# EAGLE board Humidity (EAGLE 7.2.0)
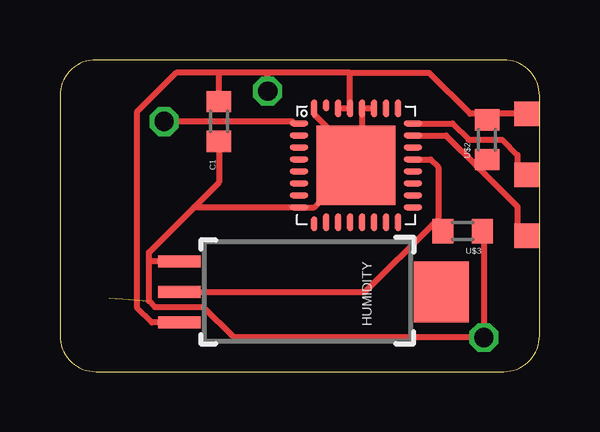
[diagram p0: board, top side]
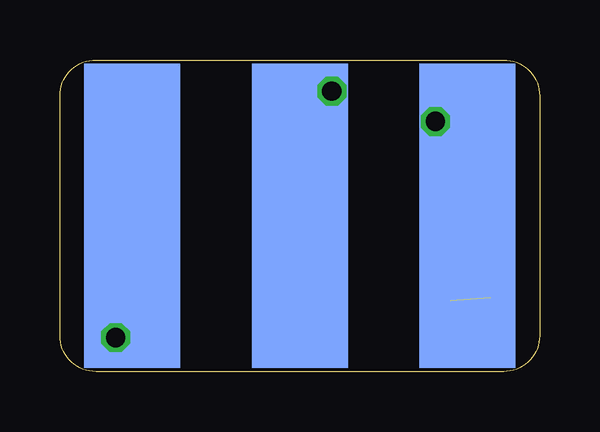
[diagram p1: board, bottom side, seen from below]

Size 20 x 13 mm. Coordinates in mm from the lower left corner, seen from the top.
Copper layers (1*16): Top 0.035mm / dielectric 1.5mm / Bottom 0.035mm
Design rules "Bilex DRU *": minimum track width 10mil, minimum drill 24mil, track to track 10mil, track to pad 10mil, pad to pad 10mil, via to via 10mil, smd to smd 10mil, copper to edge 1mil, drill to drill 8mil, minimum pad ring 10mil, minimum via ring 8mil, stop-mask expansion 4mil, vias tented up to drill 0mil, thermal gap 10mil

## Footprints (pad centres in the part's own frame; a part is rotated, then mirrored left to right if it is on the bottom)
603 = smd 0.889 x 1.016: 1 -0.826,0; 2 0.826,0
HIH-4030 = smd 0.508 x 1.778: 1 -1.27,-5.08; 2 0,-5.08; 3 1.27,-5.08 | smd 2.54 x 2.286: NC 0,5.842
CARRIER_SMD2_3POL = smd 4 x 12.7 bottom: GND -6.985,0; RX/TX 6.985,0; VCC 0,0 | smd 1.016 x 1.016: RST -9.461,0.826; TST -9.461,-1.714; VCC'' -9.461,-4.255
QFN32 = smd 0.762 x 0.254: 1 -2.375,1.75; 2 -2.375,1.25; 3 -2.375,0.75; 4 -2.375,0.25; 5 -2.375,-0.25; 6 -2.375,-0.75; 7 -2.375,-1.25; 8 -2.375,-1.75; 17 2.375,-1.75; 18 2.375,-1.25; 19 2.375,-0.75; 20 2.375,-0.25; 21 2.375,0.25; 22 2.375,0.75; 23 2.375,1.25; 24 2.375,1.75 | smd 0.254 x 0.635: 9 -1.75,-2.438 | smd 0.254 x 0.762: 10 -1.25,-2.375; 11 -0.75,-2.375; 12 -0.25,-2.375; 13 0.25,-2.375; 14 0.75,-2.375; 15 1.25,-2.375; 16 1.75,-2.375; 25 1.75,2.375; 26 1.25,2.375; 27 0.75,2.375; 28 0.25,2.375; 29 -0.25,2.375; 30 -0.75,2.375; 32 -1.75,2.375 | smd 0.254 x 0.508: 31 -1.25,2.5 | smd 3.302 x 3.302: TP 0,0

## Placement (x,y rotation side)
C1  100n  [603]  6.63,10.43 270 top
HUMIDITY  HIH-4030SMD  [HIH-4030]  10.06,3.32 270 top
U$1  CARRIER_SMD2SMD2_3POL  [CARRIER_SMD2_3POL]  10,6.5 180 top
U$2  10k  [603]  17.81,9.67 90 top
U$3  65k  [603]  16.79,5.86 180 top
U$10  MSP430G2553  [QFN32]  12.35,8.6 0 top

## Library data of the parts
C1 U$1-U$3 U$10 = thar
HUMIDITY = SparkFun-Sensors

## Nets
GND: C1.2 HUMIDITY.1 U$1.GND U$3.1 U$10.8 U$10.27 U$10.28 U$10.32 U$10.TP
N$3: U$1.TST U$10.24
N$4: U$1.RST U$2.1 U$10.23
N$5: HUMIDITY.2 U$3.2 U$10.21
N$12: U$1.RX/TX U$10.1
VCC: C1.1 HUMIDITY.3 U$1.VCC U$1.VCC'' U$2.2 U$10.29 U$10.30

## Tracks (layer width: path | path; a pad name or v marks a point on that pad's centre or on a via)
GND  (via drill 0.8)  (1 unrouted)
  Top 0.25: U$3.1 17.62,5.76 17.45,5.59 17.45,5.95 17.46,5.96 17.68,5.96 v17.68,1.42
  Top 0.254: U$10.27 U$10.28 12.6,9.25 | 12.24,9.3 12.63,9.57 12.74,9.29 | 12.24,9.3 12.29,8.02 U$10.TP 11.46,8.02 11.46,7.71 10.6,6.85 U$10.8 5.59,6.85 | U$10.32 10.6,10.73 11.2,10.13 12.09,9.67 12.72,8.78 12.6,9.25 | 12.6,9.25 12.24,9.3 | 3.71,4.59 3.71,2.94 3.96,2.69 6,2.69 7.27,1.42 v17.68,1.42 | 5.59,6.85 3.71,4.97 3.71,4.59 | 5.59,6.85 6.63,7.89 C1.2 | HUMIDITY.1 3.71,4.59
  Bottom 0.254: 2,6.5 2,5.67 2.06,3.07 | 18,6.5 17.43,5.93 v17.68,1.42 16.98,1.42 U$1.GND
N$3
  Top 0.254: U$10.24 16.37,10.35 17.05,9.67 18.44,9.67 19.08,9.04 19.08,8.6 U$1.TST
N$4
  Top 0.254: U$10.23 16.1,9.85 17.43,8.53 | 17.43,8.53 19.08,6.88 19.08,5.67 U$1.RST | U$2.1 17.74,8.85 17.43,8.53
N$5
  Top 0.25: U$3.2 15.52,6.12
  Top 0.254: U$10.21 15.45,8.85 15.78,8.53 15.78,6.37 15.52,6.12 12.73,3.32 HUMIDITY.2
N$12  (via drill 0.8)
  Top 0.254: U$10.1 9.76,10.35 9.68,10.43 v4.35,10.43
  Bottom 0.254: 3.9,6.5 v4.35,10.43 3.01,9.1 U$1.RX/TX
VCC  (via drill 0.8)
  Top 0.254: U$10.30 U$10.29 12.1,12.47 | U$1.VCC'' 17.68,10.76 | 17.68,10.76 17.11,10.76 15.39,12.47 12.1,12.47 | U$2.2 17.81,10.63 17.68,10.76 | HUMIDITY.3 3.84,2.05 3.2,2.69 3.2,10.81 4.85,12.47 6.63,12.47 | 6.95,11.45 C1.1 6.63,12.47 | v8.66,11.7 8.66,12.47 | 8.66,12.47 6.63,12.47 | 12.1,12.47 8.66,12.47
  Bottom 0.254: U$1.VCC 10,10.37 v8.66,11.7